# Altium PCB Power Supply Adapter PCB.pcbdoc
Units mm, origin at the board's own origin, x right, y up, seen from the top; angles counter-clockwise.
Board outline 225.9 x 185.9 mm, 2 copper layers (Top Layer, Bottom Layer); 63 components, 129 nets, 487 pads, 25 vias.
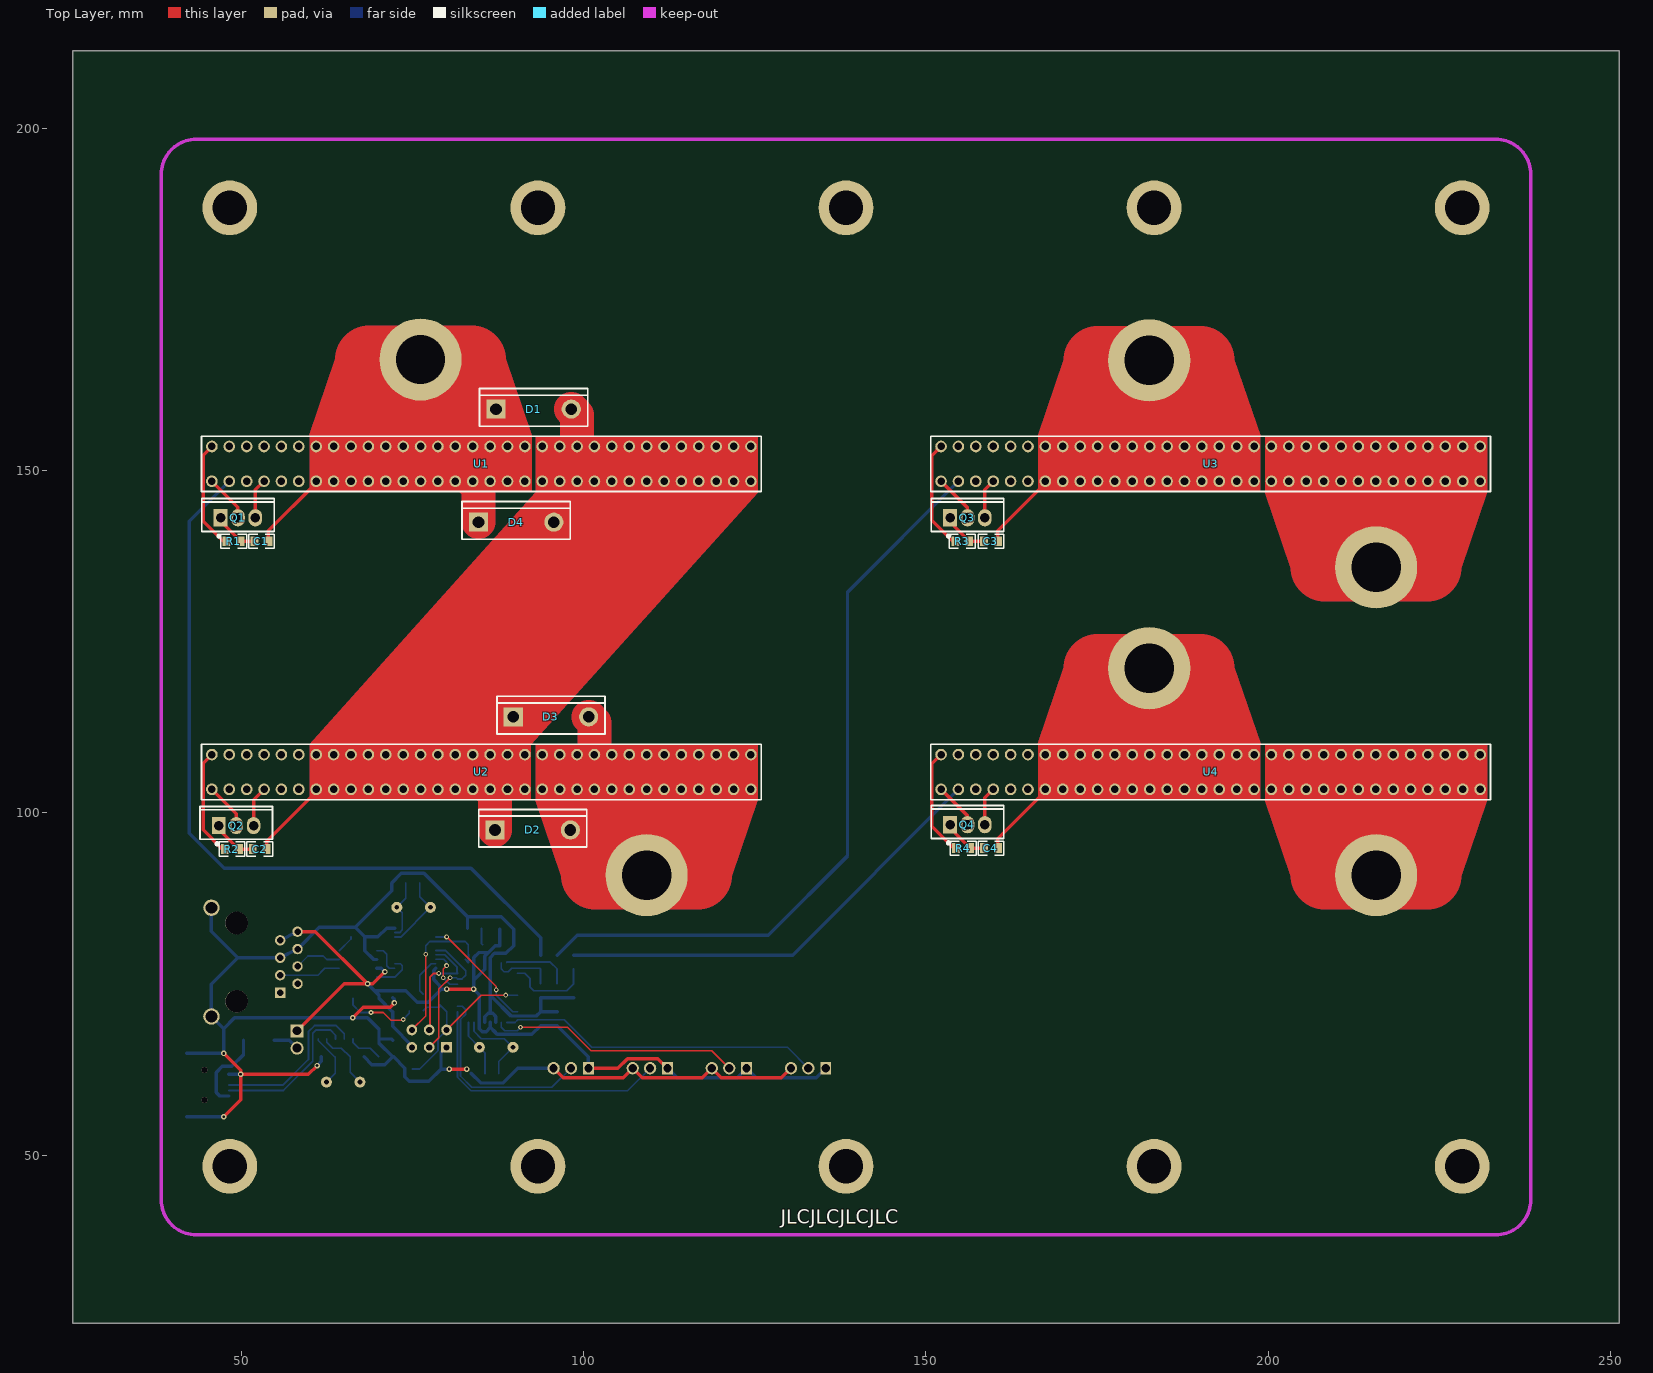
[diagram p0: Top Layer view]
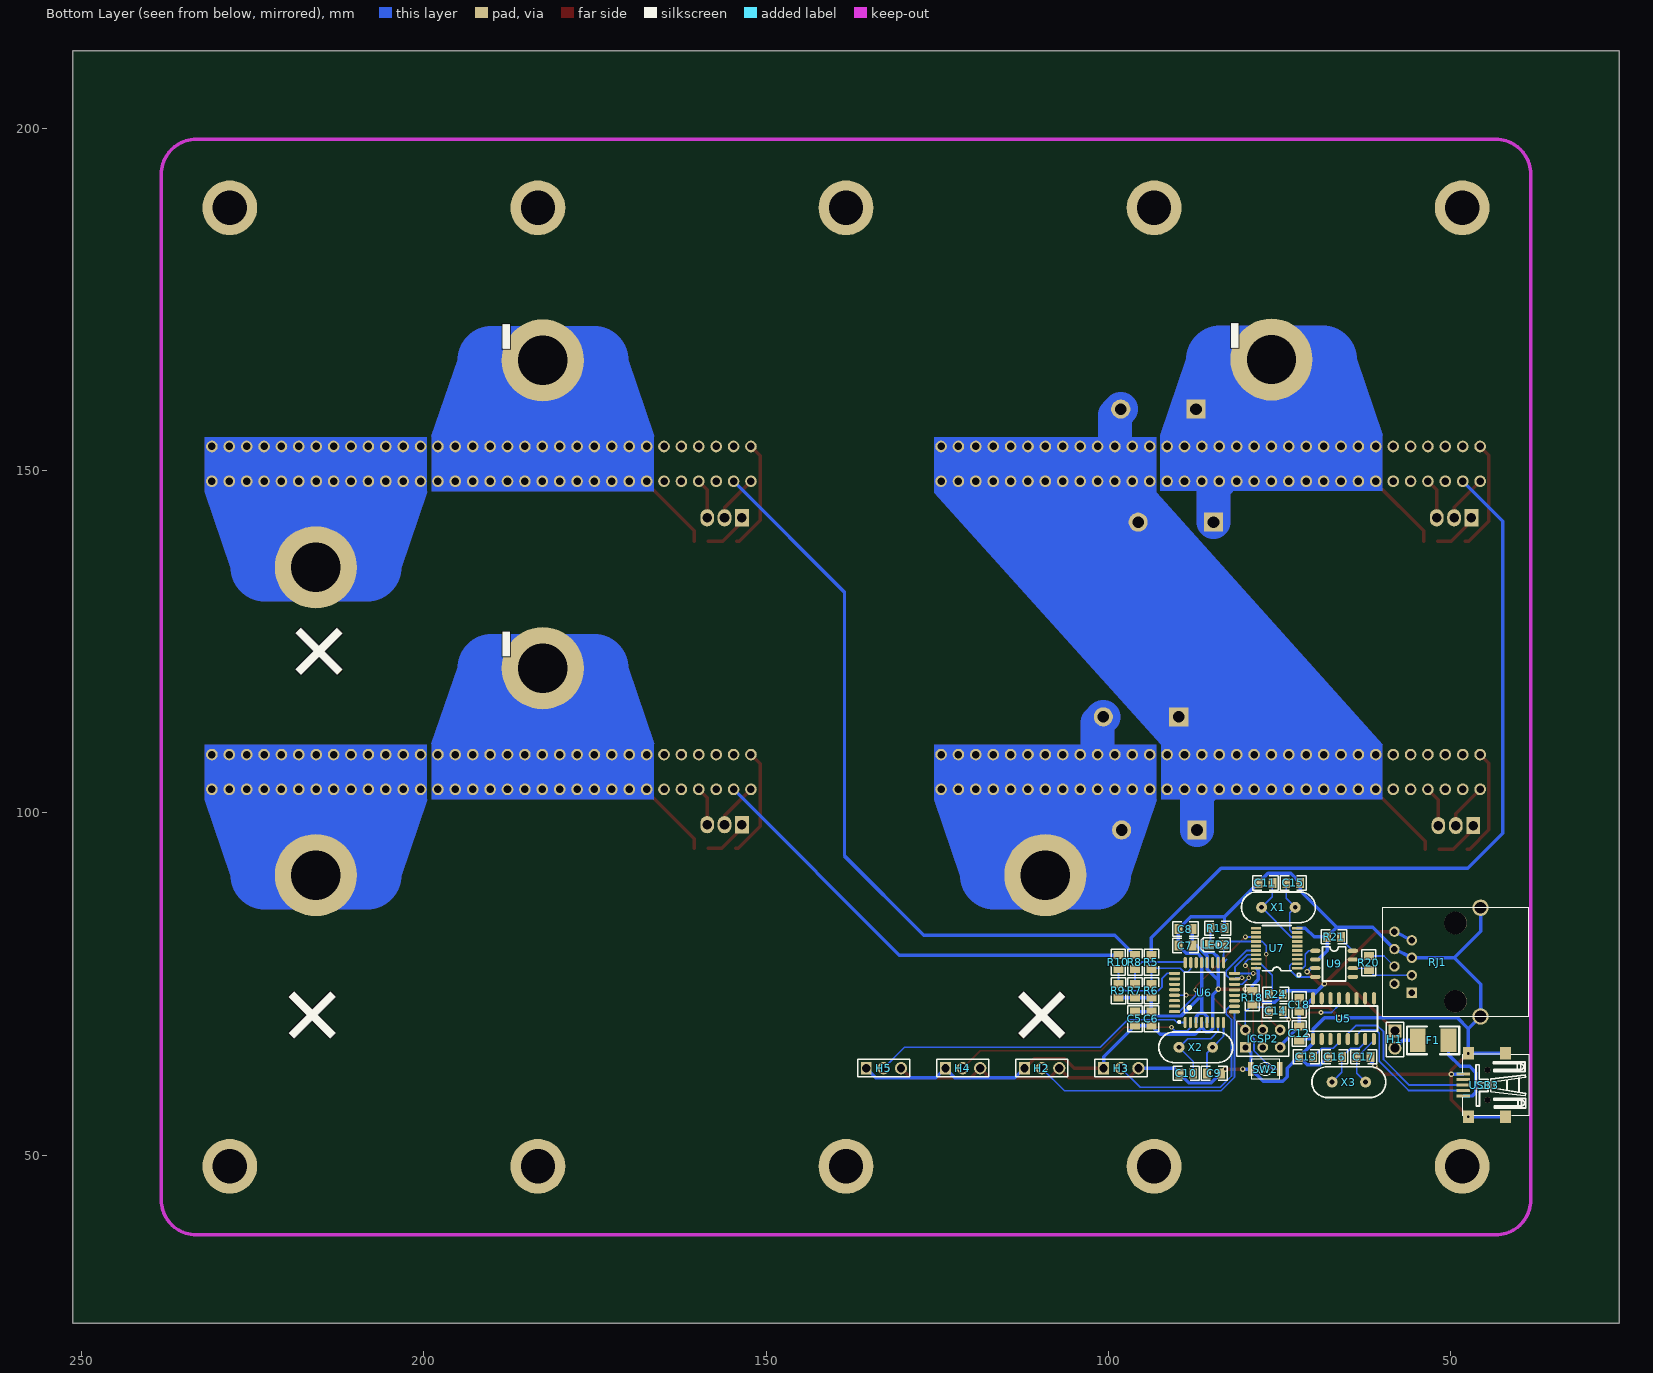
[diagram p1: Bottom Layer view, seen from below]

## Layer stack, top to bottom
Top Layer: signal copper (thickness not stored)
Dielectric: dielectric 0.32, FR-4, Dk 4.8
Bottom Layer: signal copper (thickness not stored)

## Board outline
251.3,25.4 25.4,25.4 25.4,211.3 251.3,211.3

## Components (designator, comment, footprint, x,y, rotation, side; value= is the part's Value field where it differs from the comment)
C1 "100nF" 0805#1 52.969,139.647 r180 top
C2 "100nF" 0805#1 52.715,94.689 r180 top
C3 "100nF" 0805#1 159.522,139.647 r180 top
C4 "100nF" 0805#1 159.522,94.816 r180 top
C5 "2.2uF" 0805#2 96.149,68.908 r270 bottom
C6 "100nF" 0805#2 93.736,68.908 r270 bottom
C7 "100nF" 0805#2 87.767,80.592 r180 bottom
C8 "100nF" 0805#2 87.767,83.005 r180 bottom
C9 "22pF" 0805#2 83.576,61.923 r180 bottom
C10 "22pF" 0805#2 89.672,61.923 r0 bottom
C11 "27pF" 0805#3 77.099,89.736 r180 bottom
C12 "100nF" 0805#2 72.146,66.749 r270 bottom
C13 "100nF" 0805#2 70.114,64.336 r180 bottom
C14 "100nF" 0805#2 76.591,71.067 r0 bottom
C15 "27pF" 0805#3 73.035,89.736 r0 bottom
C16 "22pF" 0805#2 67.955,64.336 r0 bottom
C17 "22pF" 0805#2 61.732,64.336 r180 bottom
C18 "100nF" 0805#3 72.146,71.956 r270 bottom
D1 "STTH6004W" DO-247_L15.6-W5.0-P10.90 92.72,158.951 r0 top
D2 "STTH6004W" DO-247_L15.6-W5.0-P10.90 92.593,97.483 r0 top
D3 "STTH6004W" DO-247_L15.6-W5.0-P10.90 95.26,113.993 r0 top
D4 "STTH6004W" DO-247_L15.6-W5.0-P10.90 90.18,142.441 r0 top
F1 "MF-MSMF030-2" 1812 52.588,66.749 r180 bottom
H1 "Power Jumper" HDR-2X1/2.54 58.176,66.876 r0 bottom
H2 "T3" HDR-TH_3P-P2.54-V 109.738,62.685 r0 bottom
H3 "T4" HDR-TH_3P-P2.54-V 98.181,62.685 r0 bottom
H4 "T2" HDR-TH_3P-P2.54-V 121.295,62.685 r0 bottom
H5 "T1" HDR-TH_3P-P2.54-V 132.852,62.685 r0 bottom
ICSP2 "ICSP" HDR-3X2/2.54 80.02,65.733 r0 bottom
LED2 "FC-A2012BK-470H2" LED-0805 84.211,80.719 r0 bottom
Q1 "TIP31C" TO-220(TO-220-3) 49.54,143.076 r90 top
Q2 "TIP31C" TO-220(TO-220-3) 49.286,98.118 r90 top
Q3 "TIP31C" TO-220(TO-220-3) 156.093,143.076 r90 top
Q4 "TIP31C" TO-220(TO-220-3) 156.093,98.245 r90 top
R1 "470" 0805#1 48.905,139.647 r180 top
R2 "470" 0805#1 48.651,94.689 r180 top
R3 "470" 0805#1 155.331,139.647 r180 top
R4 "470" 0805#1 155.458,94.816 r180 top
R5 "100" 0805#3 93.736,78.179 r270 bottom
R6 "100" 0805#3 93.736,73.988 r90 bottom
R7 "100" 0805#3 96.149,73.988 r90 bottom
R8 "100" 0805#3 96.149,78.179 r270 bottom
R9 "100" 0805#3 98.562,73.988 r90 bottom
R10 "100" 0805#3 98.562,78.179 r270 bottom
R18 "10k" 0805#2 79.004,71.956 r270 bottom
R19 "1k" 0805#2 83.068,83.132 r180 bottom
R20 "100" 0805#3 61.986,78.052 r90 bottom
R21 "20k" 0805#3 67.066,81.862 r0 bottom
R24 "10k" 0805#3 75.575,73.48 r0 bottom
RJ1 "DS1128-S80BP" RJ45-CONNFLY-DS1128-3.68MM 51.953,78.179 r270 bottom
SW2 "SKRKAEE020" SKRKAEE020 77.099,62.558 r0 bottom
U1 "10046971-001LF" "10046971-001LF PCBLIB" 45.73,153.49 r0 top
U2 "10046971-001LF" "10046971-001LF PCBLIB" 45.73,108.49 r0 top
U3 "10046971-001LF" "10046971-001LF PCBLIB" 152.23,153.49 r0 top
U4 "10046971-001LF" "10046971-001LF PCBLIB" 152.23,108.49 r0 top
U5 "CH340G" SOIC-16_150MIL 65.669,69.797 r0 bottom
U6 "ATMEGA328P-AU" TQFP-32_7X7X08P 85.989,73.734 r270 bottom
U7 "MCP2515T-I/ST" TSSOP-20_L6.5-W4.4-P0.65-LS6.4-BL 75.448,80.211 r270 bottom
U9 "MCP2551T-I/SN" SOIC-8_L5.0-W4.0-P1.27-LS6.0-BL 67.066,77.925 r90 bottom
USB3 "MINI 5PMotherboard Copper shell with column LCPVinyl" USB-MINI-3 42.047,64.844 r270 bottom
X1 "16MHz" OSC-49S-1 75.194,86.18 r270 bottom
X2 "16MHz" OSC-49S-1 87.259,65.733 r90 bottom
X3 "12MHz" OSC-49S-1 64.907,60.653 r90 bottom

## Footprints (in the part's own frame and the unit in brackets; to place one, negate y for a bottom-side part, rotate by r counter-clockwise, add the part's x,y. Pads: shape width x height; smd on the part's side, far side on the other; paste and mask are expansions set on the pad)
0805#1 [mm]
  rect 1.16x1.45 smd: 1(-1.016,0) 2(1.016,0)
  silkscreen extent -1.9,-1.03 1.87,1.04
0805#2 [mm]
  rect 1.16x1.47 smd: 1(0,0) 2(-2.032,0)
  silkscreen extent -2.89,-1.04 0.88,1.04
0805#3 [mm]
  rect 1.16x1.45 smd: 1(1.016,0) 2(-1.016,0)
  silkscreen extent -1.87,-1.04 1.9,1.03
1812 [mil]
  rect 90x133.86 smd: 1(88,0) 2(-88,0)
  silkscreen extent -150,-80 150,80
"10046971-001LF PCBLIB" [mm]
  round 1.7 hole 1.1: 1(0,0) 2(2.54,0) 3(5.08,0) 4(7.62,0) 5(10.16,0) 6(12.7,0) 7(15.24,0) 8(17.78,0) 9(20.32,0) 10(22.86,0) 11(25.4,0) 12(27.94,0) 13(30.48,0) 14(33.02,0) 15(35.56,0) 16(38.1,0) 17(40.64,0) 18(43.18,0) 19(45.72,0) 20(48.26,0) 21(50.8,0) 22(53.34,0) 23(55.88,0) 24(58.42,0) 25(60.96,0) 26(63.5,0) 27(66.04,0) 28(68.58,0) 29(71.12,0) 30(73.66,0) 31(76.2,0) 32(78.74,0) 33(78.74,-5.08) 34(76.2,-5.08) 35(73.66,-5.08) 36(71.12,-5.08) 37(68.58,-5.08) 38(66.04,-5.08) 39(63.5,-5.08) 40(60.96,-5.08) 41(58.42,-5.08) 42(55.88,-5.08) 43(53.34,-5.08) 44(50.8,-5.08) 45(48.26,-5.08) 46(45.72,-5.08) 47(43.18,-5.08) 48(40.64,-5.08) 49(38.1,-5.08) 50(35.56,-5.08) 51(33.02,-5.08) 52(30.48,-5.08) 53(27.94,-5.08) 54(25.4,-5.08) 55(22.86,-5.08) 56(20.32,-5.08) 57(17.78,-5.08) 58(15.24,-5.08) 59(12.7,-5.08) 60(10.16,-5.08) 61(7.62,-5.08) 62(5.08,-5.08) 63(2.54,-5.08) 64(0,-5.08)
  silkscreen extent -1.5,-6.58 80.24,1.5
DO-247_L15.6-W5.0-P10.90 [mm]
  rect 2.8x2.8 hole 1.7: 1(-5.5,0)
  round 2.8 hole 1.7: 2(5.5,0)
  silkscreen extent -7.9,-2.5 7.9,3
HDR-2X1/2.54 [mm]
  rect 1.9x1.9 hole 1.3: 1(0,-1.27)
  round 1.9 hole 1.3: 2(0,1.27)
  silkscreen extent -1.27,-2.54 1.27,2.54
HDR-3X2/2.54 [mil]
  rect 62x62 hole 35: 1(0,0)
  round 62 hole 35: 2(0,-100) 3(-100,0) 4(-100,-100) 5(-200,0) 6(-200,-100)
  silkscreen extent -250,-150 50,50
HDR-TH_3P-P2.54-V [mm]
  rect 1.575x1.8 hole 1.2: 1(2.54,0)
  round 1.8 hole 1.2: 2(0,0) 3(-2.54,0)
  silkscreen extent -3.81,-1.27 3.81,1.27
LED-0805 [mil]
  rect 51.2x55.1 smd: 1(-40.7,-0.05) 2(42,-0.05)
  silkscreen extent -78,-40 88,41
OSC-49S-1 [mm]
  round 1.6 hole 0.7: 1(0,-2.45) 2(0,2.45)
  silkscreen extent -2.25,-5.39 2.25,5.39
RJ45-CONNFLY-DS1128-3.68MM [mil]
  round 94.49 hole 66.93: 0(-312.6,247.44) 0(312.6,247.44)
  rect 60x60 hole 37.4: 1(175,-147.44)
  round 60 hole 37.4: 2(125,-247.44) 3(75,-147.44) 4(25,-247.44) 5(-25,-147.44) 6(-75,-247.44) 7(-125,-147.44) 8(-175,-247.44)
  round 129.92 hole 129.92 unplated: ""(-225,102.56) ""(225,102.56)
  silkscreen extent -313,-319 313,524
SKRKAEE020 [mm]
  rect 0.8x2 smd: 1(2.1,0) 2(-2.1,0)
  silkscreen extent -2,-1.5 2,1.5
SOIC-8_L5.0-W4.0-P1.27-LS6.0-BL [mm]
  oval 0.6x1.518 smd: 1(1.905,2.74) 2(0.635,2.74) 3(-0.635,2.74) 4(-1.905,2.74) 5(-1.905,-2.74) 6(-0.635,-2.74) 7(0.635,-2.74) 8(1.905,-2.74)
  silkscreen extent -2.5,-1.7 2.49,1.67
SOIC-16_150MIL [mil]
  oval 23.62x70.79 smd: 1(176,112) 2(126,112) 3(76,112) 4(26,112) 5(-24,112) 6(-74,112) 7(-124,112) 8(-174,112) 9(-174,-122) 10(-124,-122) 11(-74,-122) 12(-24,-122) 13(26,-122) 14(76,-122) 15(126,-122) 16(176,-122)
  silkscreen extent -195,-77 218,101
TO-220(TO-220-3) [mm]
  rect 2.499x2.002 hole 1.4: 1(0,2.54)
  oval 2.5x2 hole 1.4: 2(0,0) 3(0,-2.54)
  silkscreen extent -2.86,-5.3 2.8,5.3
TQFP-32_7X7X08P [mm]
  oval 1.65x0.45 smd: 1(4.369,-2.817) 2(4.369,-2.017) 3(4.369,-1.217) 4(4.369,-0.417) 5(4.369,0.381) 6(4.369,1.181) 7(4.369,1.981) 8(4.369,2.781) 17(-4.369,2.791) 18(-4.369,1.991) 19(-4.369,1.191) 20(-4.369,0.391) 21(-4.369,-0.406) 22(-4.369,-1.206) 23(-4.369,-2.007) 24(-4.369,-2.807)
  oval 0.45x1.65 smd: 9(2.804,4.381) 10(2.004,4.381) 11(1.204,4.381) 12(0.404,4.381) 13(-0.394,4.381) 14(-1.194,4.381) 15(-1.994,4.382) 16(-2.794,4.382) 25(-2.804,-4.381) 26(-2.004,-4.381) 27(-1.204,-4.381) 28(-0.404,-4.381) 29(0.394,-4.381) 30(1.194,-4.381) 31(1.994,-4.382) 32(2.794,-4.382)
  silkscreen extent -2.95,-3.86 4.45,2.94
TSSOP-20_L6.5-W4.4-P0.65-LS6.4-BL [mm]
  rect 0.4x1.494 smd: 1(2.925,3.001) 2(2.275,3.001) 3(1.625,3.001) 4(0.975,3.001) 5(0.325,3.001) 6(-0.324,3.001) 7(-0.975,3.001) 8(-1.625,3.001) 9(-2.275,3.001) 10(-2.925,3.001) 11(-2.925,-3.001) 12(-2.275,-3.001) 13(-1.625,-3.001) 14(-0.975,-3.001) 15(-0.325,-3.001) 16(0.325,-3.001) 17(0.975,-3.001) 18(1.625,-2.996) 19(2.275,-2.996) 20(2.925,-3.001)
  silkscreen extent -3.3,-2.1 4.15,3.5
USB-MINI-3 [mm]
  rect 1.8x1.6 smd: 0(0,-5.4) 0(0,0) 0(9.25,-5.4) 0(9.25,0)
  rect 0.4x2 smd: 1(6.225,-6.148) 2(5.425,-6.148) 3(4.625,-6.148) 4(3.825,-6.148) 5(3.025,-6.148)
  silkscreen extent 0.13,-6.2 9.13,3.4

## Free pads (board coordinates)
  round 12 hole 7.2: 1(76.21,166.19) 1(109.23,90.879) 1(182.636,121.105) 1(182.636,166.063) 1(215.783,90.879) 1(215.783,135.837)
  round 8 hole 5: 2(48.35,48.35) 2(48.35,188.35) 2(93.35,48.35) 2(93.35,188.35) 2(138.35,48.35) 2(138.35,188.35) 2(183.35,48.35) 2(183.35,188.35) 2(228.35,48.35) 2(228.35,188.35)

## Via types
v1: diameter 0.8, hole 0.4, Top Layer to Bottom Layer, 12 vias
v2: diameter 0.7, hole 0.35, Top Layer to Bottom Layer, 11 vias
v3: diameter 0.9, hole 0.9, Top Layer to Bottom Layer, 2 vias

## Nets (pads, with @x,y where several pads share a name; then routed paths per layer and width w, separated by ;. In a path a pad name is that pad's centre, name@x,y a point inside that pad or via, vN(x,y) a via of type N, cw(c..) or ccw(c..) an arc to the next point about the centre after c; other vN are vias at no path point)
3.1: RJ1.1
3.2: RJ1.2
5VIN: F1.1 USB3.1 | length 12.1
  Bottom Layer w0.5: USB3.1 46.875,58.619 46.365,59.129 46.365,62.05 47.254,62.939 48.651,62.939 50.353,64.641 F1.1
+: D2.2 D3.2 pad.1@109.23,90.879 U2.20 U2.21 U2.22 U2.23 U2.24 U2.25 U2.26 U2.27 U2.28 U2.29 U2.30 U2.31 U2.32 U2.33 U2.34 U2.35 U2.36 U2.37 U2.38 U2.39 U2.40 U2.41 U2.42 U2.43 U2.44 U2.45 | length 41.7
  Top Layer w5: D3.2 101.61,113.143 U2.23
  Top Layer w10: 101.737,90.879 109.23,90.879 116.723,90.879
  Bottom Layer w5: D3.2 101.61,113.143 U2.23
  Bottom Layer w10: 101.737,90.879 109.23,90.879 116.723,90.879
+2: pad.1@215.783,135.837 U3.20 U3.21 U3.22 U3.23 U3.24 U3.25 U3.26 U3.27 U3.28 U3.29 U3.30 U3.31 U3.32 U3.33 U3.34 U3.35 U3.36 U3.37 U3.38 U3.39 U3.40 U3.41 U3.42 U3.43 U3.44 U3.45 | length 30
  Top Layer w10: 208.29,135.837 215.783,135.837 223.276,135.837
  Bottom Layer w10: 208.29,135.837 215.783,135.837 223.276,135.837
+3: pad.1@215.783,90.879 U4.20 U4.21 U4.22 U4.23 U4.24 U4.25 U4.26 U4.27 U4.28 U4.29 U4.30 U4.31 U4.32 U4.33 U4.34 U4.35 U4.36 U4.37 U4.38 U4.39 U4.40 U4.41 U4.42 U4.43 U4.44 U4.45 | length 30
  Top Layer w10: 208.29,90.879 215.783,90.879 223.276,90.879
  Bottom Layer w10: 208.29,90.879 215.783,90.879 223.276,90.879
+5V: C5.1 C6.1 C7.1 C8.1 C12.2 C18.1 H1.1 H2.1 H3.1 H4.1 H5.1 ICSP2.5 R18.2 R24.2 RJ1.7 RJ1.8 U5.16 U6.4 U6.6 U6.18 U6.20 U7.20 U9.3 | length 148.5
  Top Layer w0.5: H1.1 65.034,75.004 v1(68.463,75.004) ; RJ1.8 60.843,82.624 v1(68.463,75.004) ; v1(71.003,76.782) 69.225,75.004 v1(68.463,75.004) ; v1(80.02,74.242) v1(83.957,74.242) ; H3.1 105.039,62.685 106.436,64.082 110.881,64.082 H2.1
  Bottom Layer w0.5: RJ1.7 RJ1.8 ; v1(68.463,75.004) 70.139,73.328 U5.16 72.095,70.94 C18.1 C12.2 74.94,65.987 ICSP2.5 ; 69.194,74.273 69.479,73.988 74.051,73.988 R24.2 75.702,72.337 77.353,72.337 R18.2 ; U9.3 70.495,77.29 v1(71.003,76.782) ; U7.20@78.45,77.285 78.115,76.952 78.115,75.639 79.004,74.75 R18.2 ; v1(80.02,74.242) 79.258,74.242 R18.2 ; 83.998,75.55 85.598,77.15 U6.20 85.598,79.075 86.099,79.576 ; U6.4@86.406,68.646 85.778,68.019 85.227,68.019 84.808,68.438 U6.6 84.808,73.391 v1(83.957,74.242) 83.957,78.062 U6.18 83.998,78.855 84.719,79.576 86.116,79.576 87.132,80.592 C7.1 C8.1 ; U6.4 86.406,68.645 87.159,67.892 ; 87.16,67.892 87.386,67.638 92.466,67.638 C6.1 C5.1 100.721,64.336 H3.1 ; H2.1 113.675,61.288 122.438,61.288 H4.1 125.232,61.288 133.995,61.288 H5.1
-: C1.1 D1.1 D4.1 pad.1@76.21,166.19 U1.7 U1.8 U1.9 U1.10 U1.11 U1.12 U1.13 U1.14 U1.15 U1.16 U1.17 U1.18 U1.19 U1.46 U1.47 U1.48 U1.49 U1.50 U1.51 U1.52 U1.53 U1.54 U1.55 U1.56 U1.57 U1.58 | length 54.3
  Top Layer w0.5: C1.1 53.985,141.171 60.97,148.156 U1.58
  Top Layer w5: U1.49 84.68,147.56 D4.1
  Top Layer w10: 68.717,166.19 76.21,166.19 83.703,166.19
  Bottom Layer w5: U1.49 84.68,147.56 D4.1
  Bottom Layer w10: 68.717,166.19 76.21,166.19 83.703,166.19
-2: C3.1 pad.1@182.636,166.063 U3.7 U3.8 U3.9 U3.10 U3.11 U3.12 U3.13 U3.14 U3.15 U3.16 U3.17 U3.18 U3.19 U3.46 U3.47 U3.48 U3.49 U3.50 U3.51 U3.52 U3.53 U3.54 U3.55 U3.56 U3.57 U3.58 | length 41.6
  Top Layer w0.5: C3.1 160.538,141.171 167.47,148.103 U3.58
  Top Layer w10: 175.143,166.063 182.636,166.063 190.129,166.063
  Bottom Layer w10: 175.143,166.063 182.636,166.063 190.129,166.063
-3: C4.1 pad.1@182.636,121.105 U4.7 U4.8 U4.9 U4.10 U4.11 U4.12 U4.13 U4.14 U4.15 U4.16 U4.17 U4.18 U4.19 U4.46 U4.47 U4.48 U4.49 U4.50 U4.51 U4.52 U4.53 U4.54 U4.55 U4.56 U4.57 U4.58 | length 41.4
  Top Layer w0.5: C4.1 160.538,96.213 167.47,103.145 U4.58@167.47,103.409
  Top Layer w10: 175.143,121.105 182.636,121.105 190.129,121.105
  Bottom Layer w10: 175.143,121.105 182.636,121.105 190.129,121.105
A0: R5.1 R6.1 U6.23 | length 9.2
  Bottom Layer w0.254: U6.23 87.996,77.188 88.402,76.782 89.037,76.782 89.545,77.29 93.609,77.29 R5.1 R6.1
A1: R7.1 R8.1 U6.24 | length 10
  Bottom Layer w0.254: U6.24 88.796,78.179 95.133,78.179 R8.1 R7.1
A2: R9.1 R10.1 U6.25 | length 12.6
  Bottom Layer w0.254: U6.25 91.44,76.538 92.212,75.766 92.212,74.496 92.72,73.988 97.546,73.988 R9.1 R10.1
A3: U6.26
C1_2: C1.2 Q1.1 R1.1 | length 6.7
  Top Layer w0.5: Q1.1 47,142.568 R1.1 C1.2
C2_2: C2.2 Q2.1 R2.1 | length 6.7
  Top Layer w0.5: Q2.1 46.746,97.61 R2.1 C2.2
C4_2: C4.2 Q4.1 R4.1 | length 6.7
  Top Layer w0.5: Q4.1 153.553,97.737 R4.1 C4.2
C9_2: C9.2 U6.8 X2.1 | length 8.4
  Bottom Layer w0.254: U6.8 83.208,67.334 X2.1 85.608,64.934 C9.2
C10_2: C10.2 U6.7 X2.2 | length 12.6
  Bottom Layer w0.254: U6.7 84.008,68.095 85.1,67.003 88.44,67.003 X2.2 ; C10.2 87.64,63.664 X2.2
CANH: R20.1 RJ1.4 U9.7 | length 6.9
  Bottom Layer w0.254: RJ1.4 59.762,79.068 R20.1 62.494,78.56 U9.7
CANL: R20.2 RJ1.3 U9.6 | length 9
  Bottom Layer w0.254: RJ1.3 61.224,76.274 R20.2 62.24,77.29 U9.6
CM1: R5.2 U1.63 | length 114
  Bottom Layer w0.5: U1.63 42.428,142.568 42.428,96.975 47.508,91.895 83.576,91.895 93.736,81.735 R5.2
CM2: R8.2 U3.63 | length 109.9
  Bottom Layer w0.5: R8.2 99.07,82.116 127.01,82.116 138.567,93.673 138.567,132.207 U3.63
CM3: R10.2 U4.63 | length 66.2
  Bottom Layer w0.5: R10.2 130.556,79.195 U4.63@154.77,103.409
CS1: U6.14 U7.18 | length 6.7
  Top Layer w0.254: v2(79.512,75.893) 79.512,77.163 v2(80.02,77.671)
  Bottom Layer w0.254: U7.18 79.613,78.586 80.02,78.179 v2(80.02,77.671) ; v2(79.512,75.893) 80.477,74.928 U6.14
D3: H5.2 U6.1 | length 47.2
  Bottom Layer w0.254: U6.1 90.002,69.365 90.411,69.774 97.188,69.774 101.229,65.733 129.804,65.733 H5.2
D4: H4.2 U6.2 | length 36.9
  Top Layer w0.254: v2(90.815,68.654) 97.673,68.654 101.102,65.225 118.755,65.225 H4.2
  Bottom Layer w0.254: U6.2 88.006,68.669 88.506,68.169 90.33,68.169 v2(90.815,68.654)
D5: H2.2 U6.9 | length 39.9
  Bottom Layer w0.254: U6.9 81.608,61.352 83.576,59.383 106.436,59.383 H2.2
D6: H3.2 U6.10 | length 29.4
  Bottom Layer w0.254: U6.10 82.278,71.73 82.814,71.194 82.814,70.559 82.052,69.797 82.052,61.542 83.703,59.891 95.387,59.891 H3.2
D7: U6.11
D8: U6.12
D9: U6.13
GND: C5.2 C6.2 C7.2 C8.2 C9.1 C10.1 C11.2 C12.1 C13.2 C15.2 C16.1 C17.1 C18.2 H2.3 H3.3 H4.3 H5.3 ICSP2.1 R6.2 R7.2 R9.2 R19.1 R21.1 RJ1.0 RJ1.5 RJ1.6 SW2.1 U5.1 U6.3 U6.5 U6.21 U7.10 U9.2 USB3.0 USB3.5 | length 274.1
  Top Layer w0.5: v1(47.447,55.594) 49.921,58.068 v1(49.921,61.796) ; v1(47.447,64.844) 49.921,62.37 v1(49.921,61.796) ; v1(61.097,63.066) 59.827,61.796 v1(49.921,61.796) ; v1@66.177,70.051 v1(66.304,70.051) 67.828,71.575 71.765,71.575 v1(72.4,72.21) ; v1(80.401,62.558) v1(82.941,62.558) ; H3.3 97.038,61.288 105.801,61.288 H2.3 108.595,61.288 117.358,61.288 H4.3 120.152,61.288 128.915,61.288 H5.3
  Bottom Layer w0.5: USB3.0@42.047,55.594 v1(47.447,55.594) ; USB3.0@42.047,64.844 v1(47.447,64.844) 47.447,68.46 ; RJ1.0@45.668,86.119 45.668,82.686 49.54,78.814 ; USB3.5 v1(49.921,61.796) ; v1(61.097,63.066) 61.732,63.701 C17.1 ; C16.1 69.098,63.193 71.003,63.193 C13.2 ; U9.2 69.352,78.56 68.082,79.83 R21.1 ; C12.1 71.943,66.952 U5.1 ; C18.2 72.4,72.718 v1(72.4,72.21) ; U7.10 71.261,83.136 69.987,81.862 R21.1 ; SW2.1 v1(80.401,62.558) ; ICSP2.1 79.199,64.912 SW2.1 77.422,60.78 74.559,60.78 73.924,61.415 73.924,62.685 72.273,64.336 C13.2 ; R19.1 83.068,84.783 ; C9.1 84.973,60.526 88.275,60.526 C10.1 90.434,62.685 H3.3 ; U6.5 85.608,70.178 86.116,70.686 86.751,70.686 87.206,70.231 U6.3 ; 86.395,70.686 U6.21@86.395,78.377 ; 86.395,73.328 86.705,73.018 89.418,70.305 93.101,70.305 C6.2 ; U6.21 86.395,78.839 87.005,79.449 88.656,79.449 C7.2 C8.2 88.022,84.783 83.068,84.783 ; C5.2 C6.2 ; R9.2 R6.2 C6.2 ; 47.447,68.46 45.668,70.239 45.668,74.942 49.54,78.814 ; 47.447,68.46 49.038,70.051 v1(66.304,70.051) 68.463,70.051 70.139,68.375 U5.1 ; 49.54,78.814 RJ1.5 RJ1.6 61.413,83.259 66.685,83.259 ; 66.685,83.259 72.019,88.593 C15.2 73.416,91.133 76.718,91.133 C11.2 83.068,84.783 ; 66.685,83.259 R21.1 ; U5.1 70.139,66.343 C13.2
H1_2: F1.2 H1.2 | length 3.8
  Bottom Layer w0.5: F1.2 57.033,66.749 H1.2
INT1: U6.32 U7.13 | length 17.2
  Top Layer w0.254: v2(80.02,81.862) 87.259,74.623 v2(87.259,74.115)
  Bottom Layer w0.254: U7.13 78.475,81.862 v2(80.02,81.862) ; v2(87.259,74.115) 87.259,73.353 89.672,70.94 U6.32
M8RX: U6.30
M8TX: U6.31
Q2_2: Q2.2 U2.64 | length 6.8
  Top Layer w0.5: U2.64 49.286,99.854 Q2.2
Q2_3: Q2.3 U2.61 | length 5.9
  Top Layer w0.5: Q2.3 51.826,101.886 U2.61
Q3_1: C3.2 Q3.1 R3.1 | length 6.7
  Top Layer w0.5: Q3.1 153.553,142.441 R3.1 C3.2
Q4_2: Q4.2 U4.64 | length 6.8
  Top Layer w0.5: U4.64 156.093,99.547 Q4.2
Q4_3: Q4.3 U4.61 | length 5.7
  Top Layer w0.5: Q4.3 158.633,102.193 U4.61
R2_2: R2.2 U2.1 | length 15.9
  Top Layer w0.5: U2.1@45.73,108.489 44.46,107.219 44.46,97.483 47.254,94.689 R2.2
R4_2: R4.2 U4.1 | length 15.9
  Top Layer w0.5: U4.1@152.23,108.489 150.886,107.145 150.886,97.991 154.061,94.816 R4.2
R19_2: LED2.2 R19.2 | length 2.5
  Bottom Layer w0.254: R19.2 85.1,80.898 LED2.2
R21_2: R21.2 U9.8 | length 2.7
  Bottom Layer w0.254: U9.8 66.05,81.554 R21.2
R24_1: R24.1 U7.19 | length 6
  Bottom Layer w0.254: R24.1 76.093,73.978 76.093,76.284 77.745,77.936 U7.19
RESET: C14.1 ICSP2.2 R18.1 SW2.2 U6.29 | length 28
  Top Layer w0.254: ICSP2.2 85.1,73.353 v2(88.656,73.353)
  Bottom Layer w0.254: SW2.2 76.083,62.558 78.75,65.225 78.75,67.003 ICSP2.2 80.02,70.94 R18.1 79.004,71.575 77.099,71.575 C14.1 ; v2(88.656,73.353) 90.358,73.353 U6.29
RX: U5.2
RXCAN1: U7.2 U9.4 | length 6
  Bottom Layer w0.254: U9.4 72.527,76.02 73.543,77.036 73.543,77.671 73.279,77.935 U7.2@72.448,77.935
S$18: 
S$20: 
S$2208: 
S$3753: 
S$3758: 
S$3763: 
SCK1: ICSP2.6 LED2.1 U6.17 U7.14 | length 23.1
  Top Layer w0.254: ICSP2.6 76.972,70.305 v2(76.972,79.322)
  Bottom Layer w0.254: v2(76.972,79.322) 76.972,80.592 77.566,81.186 U7.14 82.711,81.186 LED2.1 ; 82.73,78.57 U6.17 LED2.1@83.177,80.719
SCL: U6.28
SDA: U6.27
SI1: ICSP2.3 U6.15 U7.16 | length 20.2
  Top Layer w0.254: ICSP2.3 78.877,67.13 78.877,74.242 v2(80.528,75.893)
  Bottom Layer w0.254: U7.16 79.837,79.886 82.814,76.909 82.814,76.274 82.268,75.728 U6.15 81.442,75.893 v2(80.528,75.893)
SO1: ICSP2.4 U6.16 U7.17 | length 16.7
  Top Layer w0.254: ICSP2.4 77.607,68.4 77.607,76.02 78.115,76.528 v2(78.877,76.528)
  Bottom Layer w0.254: U7.17@78.45,79.236 79.725,79.236 81.544,77.417 81.544,76.683 U6.16@81.608,76.619 ; v2(78.877,76.528) U6.16
TX: U5.3
TXCAN1: U7.1 U9.1 | length 4.7
  Bottom Layer w0.254: U9.1 70.749,79.83 71.257,79.322 71.257,77.671 71.643,77.285 U7.1@72.446,77.285
U1_1: R1.2 U1.1 | length 16.1
  Top Layer w0.5: U1.1 44.46,152.22 44.46,142.568 47.381,139.647 R1.2
U1_2: U1.2
U1_3: U1.3
U1_4: U1.4
U1_5: U1.5
U1_6: U1.6
U1_20: C2.1 D1.2 D2.1 D3.1 D4.2 U1.20 U1.21 U1.22 U1.23 U1.24 U1.25 U1.26 U1.27 U1.28 U1.29 U1.30 U1.31 U1.32 U1.33 U1.34 U1.35 U1.36 U1.37 U1.38 U1.39 U1.40 U1.41 U1.42 U1.43 U1.44 U1.45 U2.7 U2.8 U2.9 U2.10 U2.11 U2.12 U2.13 U2.14 U2.15 U2.16 U2.17 U2.18 U2.19 U2.46 U2.47 U2.48 U2.49 U2.50 U2.51 U2.52 U2.53 U2.54 U2.55 U2.56 U2.57 U2.58 | length 36.1
  Top Layer w0.5: C2.1 53.731,95.832 60.97,103.071 U2.58@60.97,103.409
  Top Layer w5: U2.48 87.093,102.687 D2.1 ; D1.2 99.07,158.101 U1.22@99.07,153.363
  Bottom Layer w5: U2.48 87.093,102.687 D2.1 ; D1.2 99.07,158.101 U1.22@99.07,153.363
U1_59: U1.59
U1_60: U1.60
U1_61: Q1.3 U1.61 | length 5.9
  Top Layer w0.5: Q1.3 52.08,147.14 U1.61
U1_62: U1.62
U1_64: Q1.2 U1.64 | length 6.9
  Top Layer w0.5: U1.64 49.54,144.6 Q1.2
U2_2: U2.2
U2_3: U2.3
U2_4: U2.4
U2_5: U2.5
U2_6: U2.6
U2_59: U2.59
U2_60: U2.60
U2_62: U2.62
U2_63: U2.63
U3_1: R3.2 U3.1 | length 16
  Top Layer w0.5: U3.1 150.886,152.146 150.886,142.695 153.934,139.647 R3.2
U3_2: U3.2
U3_3: U3.3
U3_4: U3.4
U3_5: U3.5
U3_6: U3.6
U3_59: U3.59
U3_60: U3.60
U3_61: Q3.3 U3.61 | length 5.8
  Top Layer w0.5: Q3.3 158.633,147.193 U3.61
U3_62: U3.62
U3_64: Q3.2 U3.64 | length 6.9
  Top Layer w0.5: U3.64 156.093,144.547 Q3.2
U4_2: U4.2
U4_3: U4.3
U4_4: U4.4
U4_5: U4.5
U4_6: U4.6
U4_59: U4.59
U4_60: U4.60
U4_62: U4.62
U5_4: C13.1 U5.4 | length 5.2
  Bottom Layer w0.254: U5.4 66.329,66.47 67.193,65.606 68.844,65.606 C13.1
U5_5: U5.5 USB3.3 | length 24.1
  Bottom Layer w0.254: USB3.3 56.091,60.219 59.827,63.955 59.827,68.019 60.716,68.908 63.891,68.908 65.059,67.74 U5.5
U5_6: U5.6 USB3.2 | length 22.5
  Bottom Layer w0.254: USB3.2 56.18,59.419 60.462,63.701 60.462,67.765 60.97,68.273 63.002,68.273 63.789,67.486 U5.6
U5_7: C16.2 U5.7 X3.2 | length 9
  Bottom Layer w0.254: U5.7 62.519,66.47 63.383,65.606 64.653,65.606 C16.2 65.923,62.087 X3.2
U5_8: C17.2 U5.8 X3.1 | length 8
  Bottom Layer w0.254: U5.8 61.249,66.724 63.637,64.336 C17.2 63.764,61.96 X3.1
U5_9: U5.9
U5_10: U5.10
U5_11: U5.11
U5_12: U5.12
U5_13: C14.2 U5.13 | length 10.9
  Top Layer w0.254: v2(68.971,70.813) 70.749,70.813 71.892,69.67 73.543,69.67 v2(73.67,69.797)
  Bottom Layer w0.254: U5.13 66.329,71.931 67.447,70.813 v2(68.971,70.813) ; v2(73.67,69.797) 74.559,70.686 C14.2
U5_14: U5.14
U5_15: U5.15
U6_19: U6.19
U6_22: U6.22
U7_3: U7.3
U7_4: U7.4
U7_5: U7.5
U7_6: U7.6
U7_7: U7.7
U7_11: U7.11
U7_12: U7.12
U7_15: U7.15
U9_5: U9.5
USB3_4: USB3.4
X1_1: C11.1 U7.8 X1.1 | length 11.2
  Bottom Layer w0.254: U7.8 73.3,81.836 X1.1 76.083,87.741 C11.1
X1_2: C15.1 U7.9 X1.2 | length 9
  Bottom Layer w0.254: U7.9 73.151,82.486 73.543,82.878 73.543,85.381 X1.2 74.051,87.487 C15.1
pads on no net: RJ1.
copper on no net:
  other v3: 44.647,58.019 44.647,62.419

## Keep-outs
Keep-Out Layer:
  lines w0.5: 38.35,43.43 ccw(c43.43,43.43) 43.43,38.35 ; 38.35,193.27 cw(c43.43,193.27) 43.43,198.35 ; 233.27,38.35 ccw(c233.27,43.43) 238.35,43.43 ; 233.27,198.35 cw(c233.27,193.27) 238.35,193.27

## Other copper
Top Layer:
  rectangle net -: 59.954,147.013 92.466,155.141
  rectangle net U1_20: 92.974,146.759 125.486,154.887
  rectangle net U1_20: 59.954,101.928 92.339,109.929
  rectangle net +: 92.974,101.928 125.486,109.929
  rectangle net -2: 166.38,146.886 198.892,155.014
  rectangle net +2: 199.527,146.886 232.039,154.887
  rectangle net -3: 166.38,101.928 198.892,110.056
  rectangle net +3: 199.527,101.928 232.039,109.929
  region net +3: 199.527,101.928 203.337,90.752 228.229,90.752 232.039,101.928
  region net -3: 198.892,110.056 195.082,121.232 170.19,121.232 166.38,110.056
  region net +2: 199.527,146.886 203.337,135.71 228.229,135.71 232.039,146.886
  region net -2: 198.892,155.014 195.082,166.19 170.19,166.19 166.38,155.014
  region net +: 92.974,101.928 96.784,90.752 121.676,90.752 125.486,101.928
  region net U1_20: 92.974,146.759 59.954,109.929 92.339,109.929 125.486,146.759
  region net -: 92.466,155.141 88.656,166.317 63.764,166.317 59.954,155.141
Bottom Layer:
  rectangle net -: 59.954,147.013 92.466,155.141
  rectangle net U1_20: 92.974,146.759 125.486,154.887
  rectangle net U1_20: 59.954,101.928 92.339,109.929
  rectangle net +: 92.974,101.928 125.486,109.929
  rectangle net +3: 199.527,101.928 232.039,109.929
  rectangle net -3: 166.38,101.928 198.892,110.056
  rectangle net +2: 199.527,146.886 232.039,154.887
  rectangle net -2: 166.38,146.886 198.892,155.014
  region net -2: 198.892,155.014 195.082,166.19 170.19,166.19 166.38,155.014
  region net +2: 199.527,146.886 203.337,135.71 228.229,135.71 232.039,146.886
  region net -3: 198.892,110.056 195.082,121.232 170.19,121.232 166.38,110.056
  region net +3: 199.527,101.928 203.337,90.752 228.229,90.752 232.039,101.928
  region net +: 92.974,101.928 96.784,90.752 121.676,90.752 125.486,101.928
  region net U1_20: 92.974,146.759 59.954,109.929 92.339,109.929 125.486,146.759
  region net -: 92.466,155.141 88.656,166.317 63.764,166.317 59.954,155.141

## Silkscreen, mask and mechanical layers (free items; w line width, h text height)
Top Overlay:
  text "JLCJLCJLCJLC" at 128.788,39.952 h2.03
Bottom Overlay:
  text "-" at 85.274,172.159 h10 r90
  text "-" at 191.7,172.032 h10 r90
  text "-" at 191.7,127.074 h10 r90
  text "+" at 216.311,116.426 h10 r315
  text "+" at 116.83,71.468 h10 r45
  text "+" at 223.383,71.468 h10 r45
Document:
  lines w0.5 net S$3758: 138.351,146.378 138.351,157.3
  lines w0.5 net S$3763: 131.455,118.35 146.695,118.35 ; 131.455,138.55 146.695,138.55